# Altium PCB FLIR LWIR.PcbDoc (part 5 of 5)
Units mil, origin at the board's own origin, x right, y up, seen from the top; angles counter-clockwise.
Board outline 1511 x 3115 mil, 2 copper layers (Top Layer, Bottom Layer); 105 components, 128 nets, 625 pads, 229 vias.
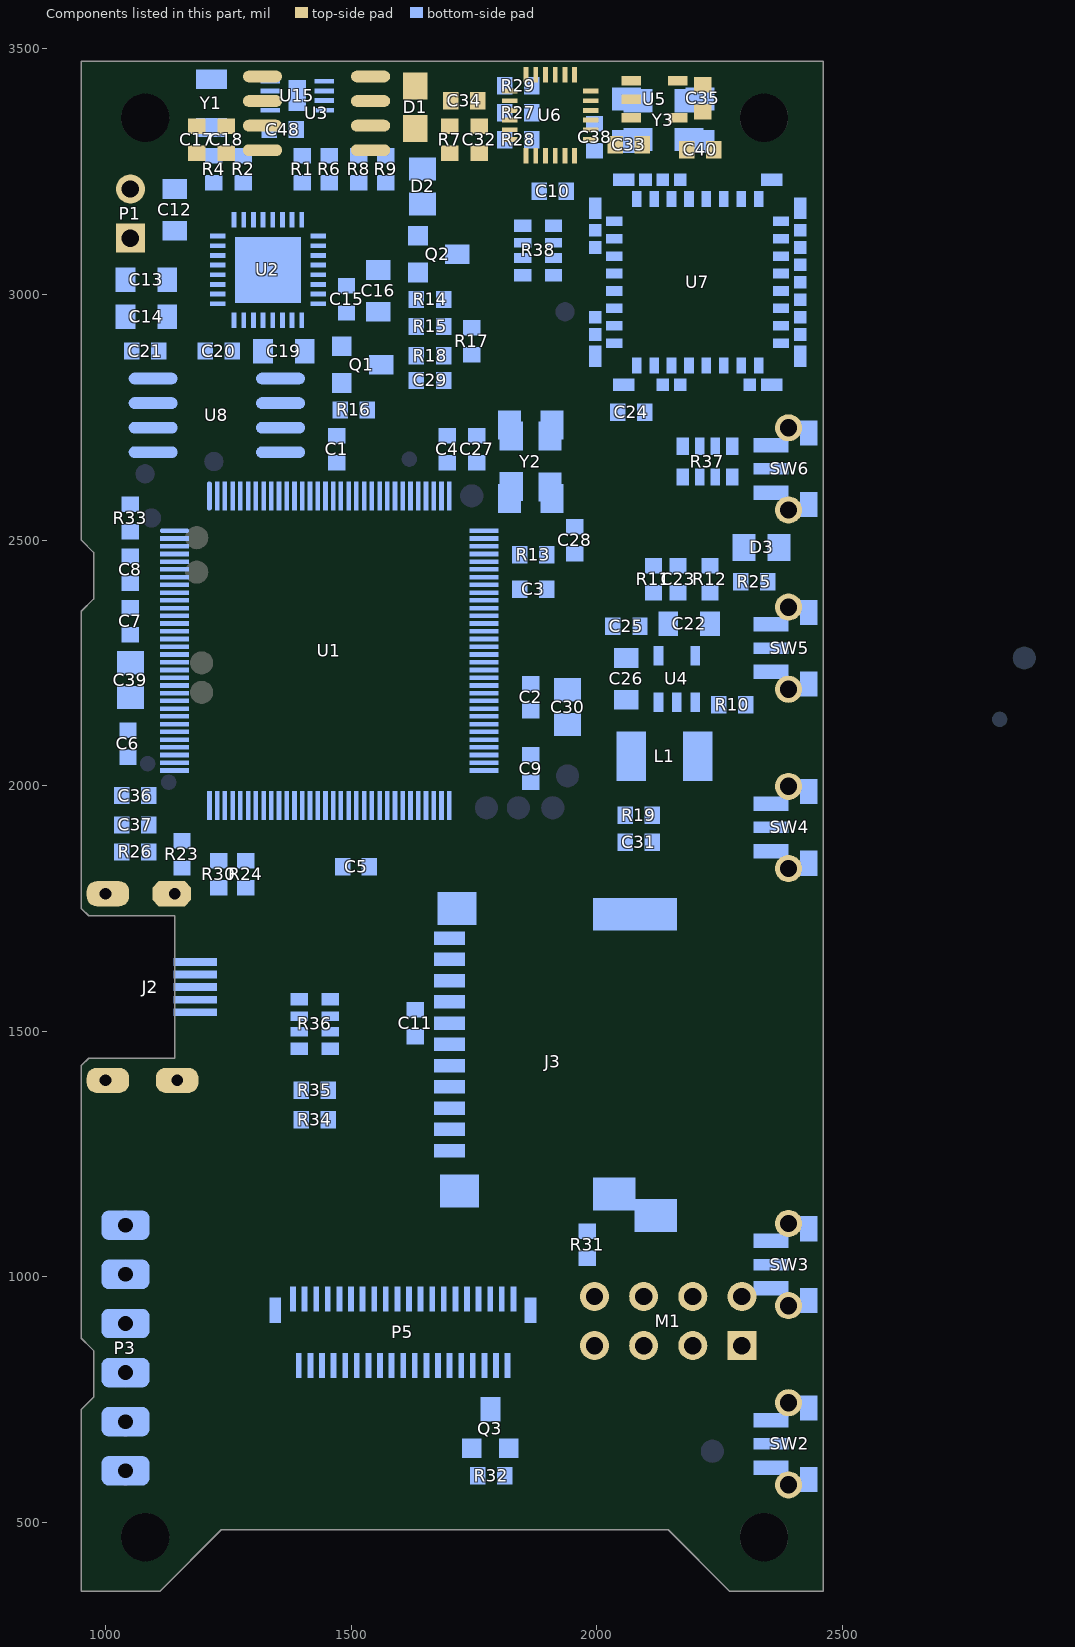
[diagram p5: the components of this part, seen from the top]

## Silkscreen, mask and mechanical layers (free items; w line width, h text height) (continued)
Bottom Overlay:
  lines w10: 1990,1790 2420,1790
  text "B+" at 990,3145 h60 r90
  text "V1.1" at 1840,2850 h60 r270
  text "FLIR LEPTON" at 1777.54,2842.54 h60 r270
  text "PF8" at 1655,2685 h60
  text "B6" at 1055,2620 h60
  text "B7" at 1105,2520 h60 r90
  text "PF7" at 1730,2515 h60
  text "GND" at 2000,2055 h60
  text "T" at 1835,1990 h60
  text "R" at 1745,1965 h60
  text "3V3" at 2035,1940 h60
  text "POSYSTORAGE" at 1553.38,1348.38 h80 r270
  text "U4TX" at 1225,1075 h60
  text "SCK" at 1200,975 h60
  text "SWD" at 1205,875 h60
  text "GND" at 1200,775 h60
  text "3V3M" at 1225,675 h60
  text "VBAT" at 1230,575 h60
Top Solder:
  rectangle: 1880,3320 1938,3405
Bottom Solder:
  rectangle: 1339,3225 1370,3255
  text "posystorage" at 2415,1740 h120 r90

## Text inside footprints (layer, text, board x,y; h text height)
J3: Bottom Overlay "TF-CARD" at 2245,1590 h75 r90